# Altium PCB Flight_Controller_PCB.PcbDoc
Units mm, origin at the board's own origin, x right, y up, seen from the top; angles counter-clockwise.
Board outline 56 x 53 mm, 4 copper layers (Top Layer, Layer 1, Layer 2, Bottom Layer), stack 1.587 mm thick; 48 components, 33 nets, 173 pads, 50 vias.
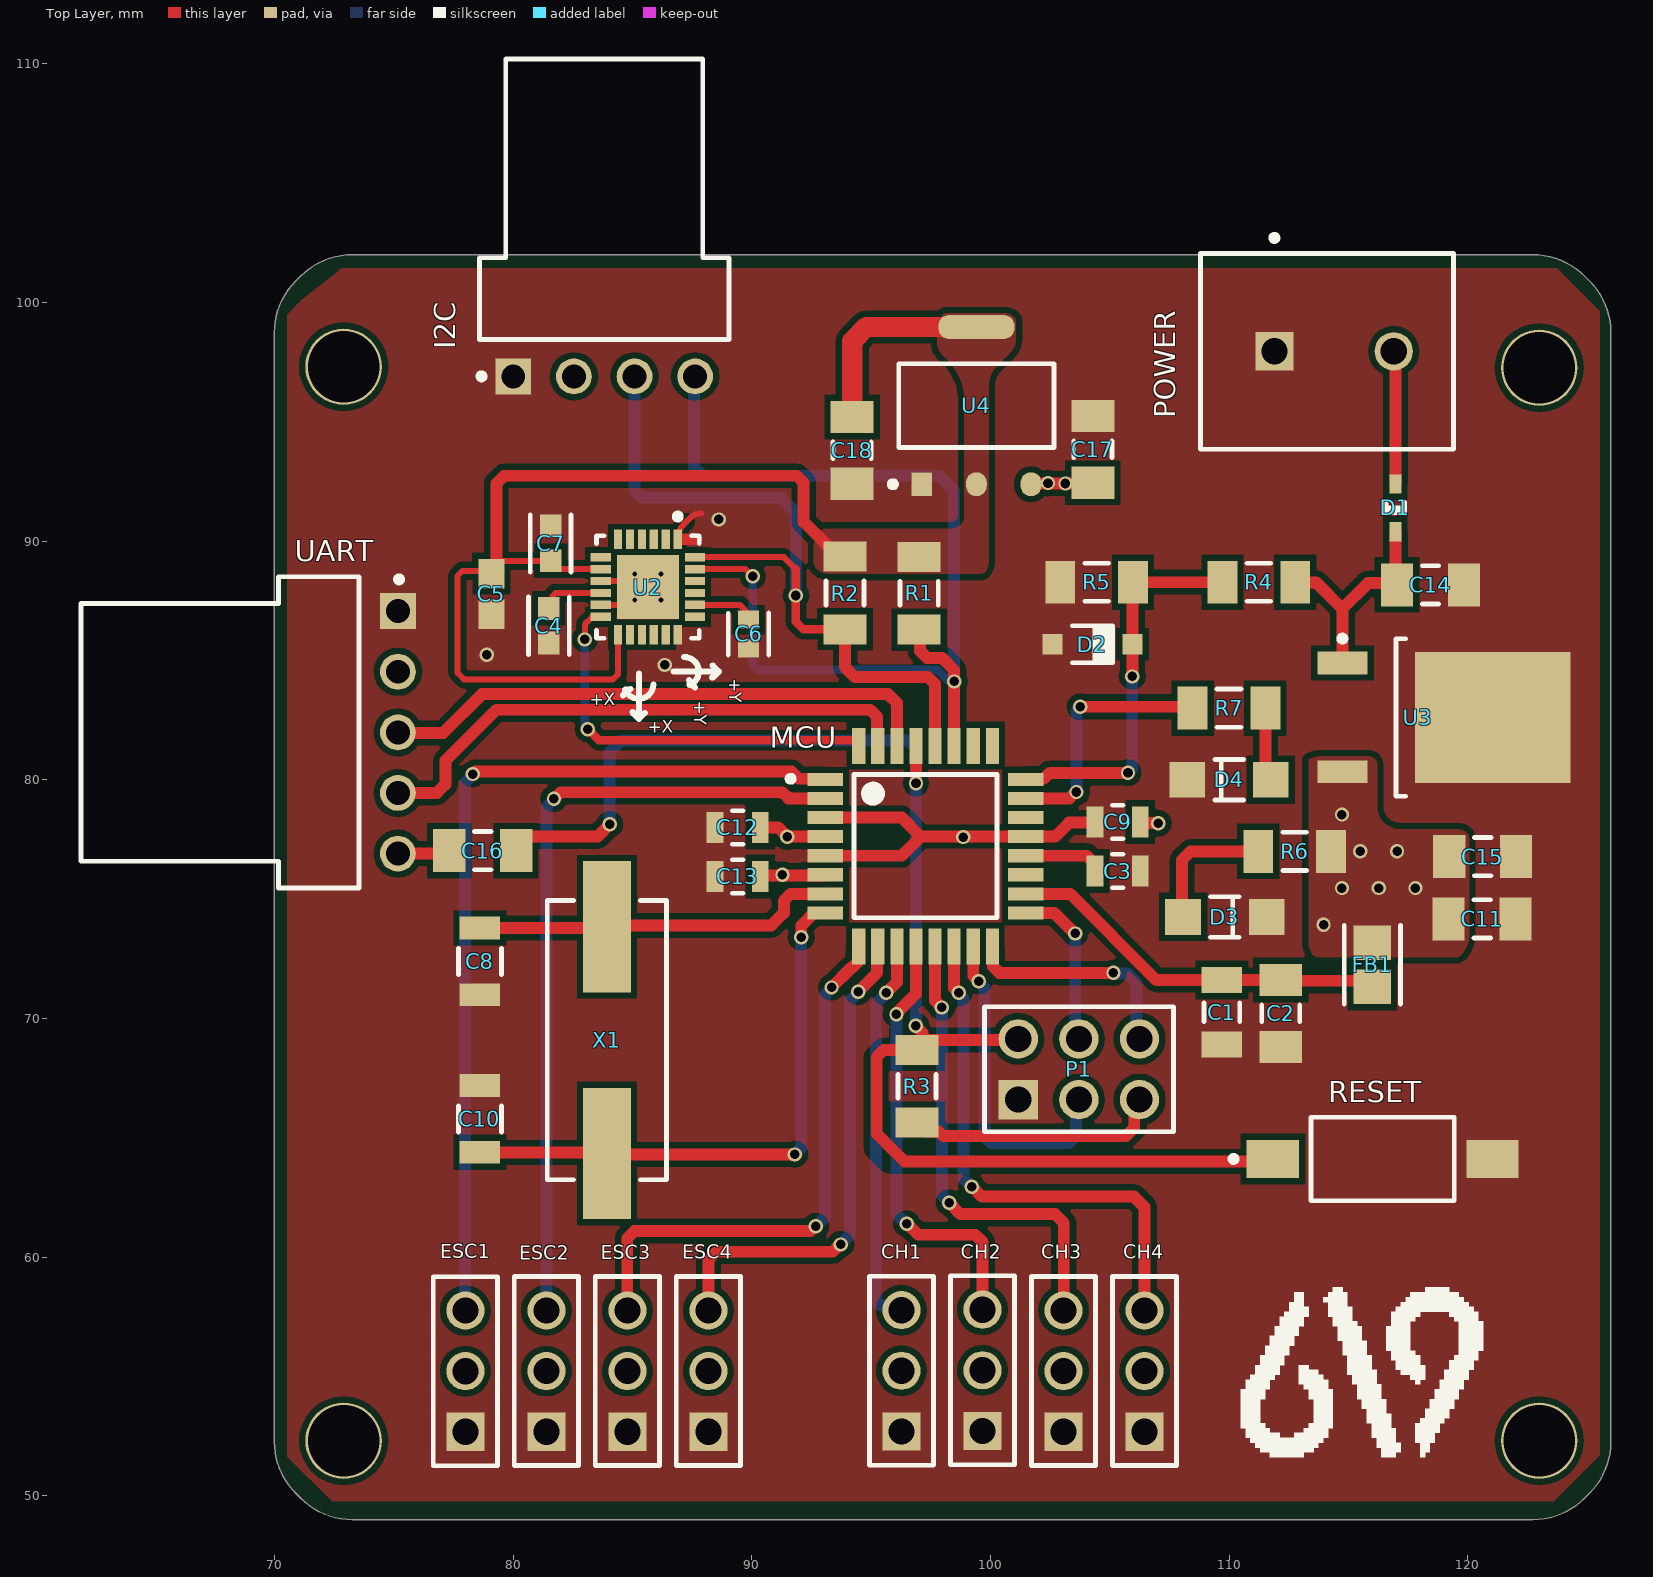
[diagram p0: Top Layer view]
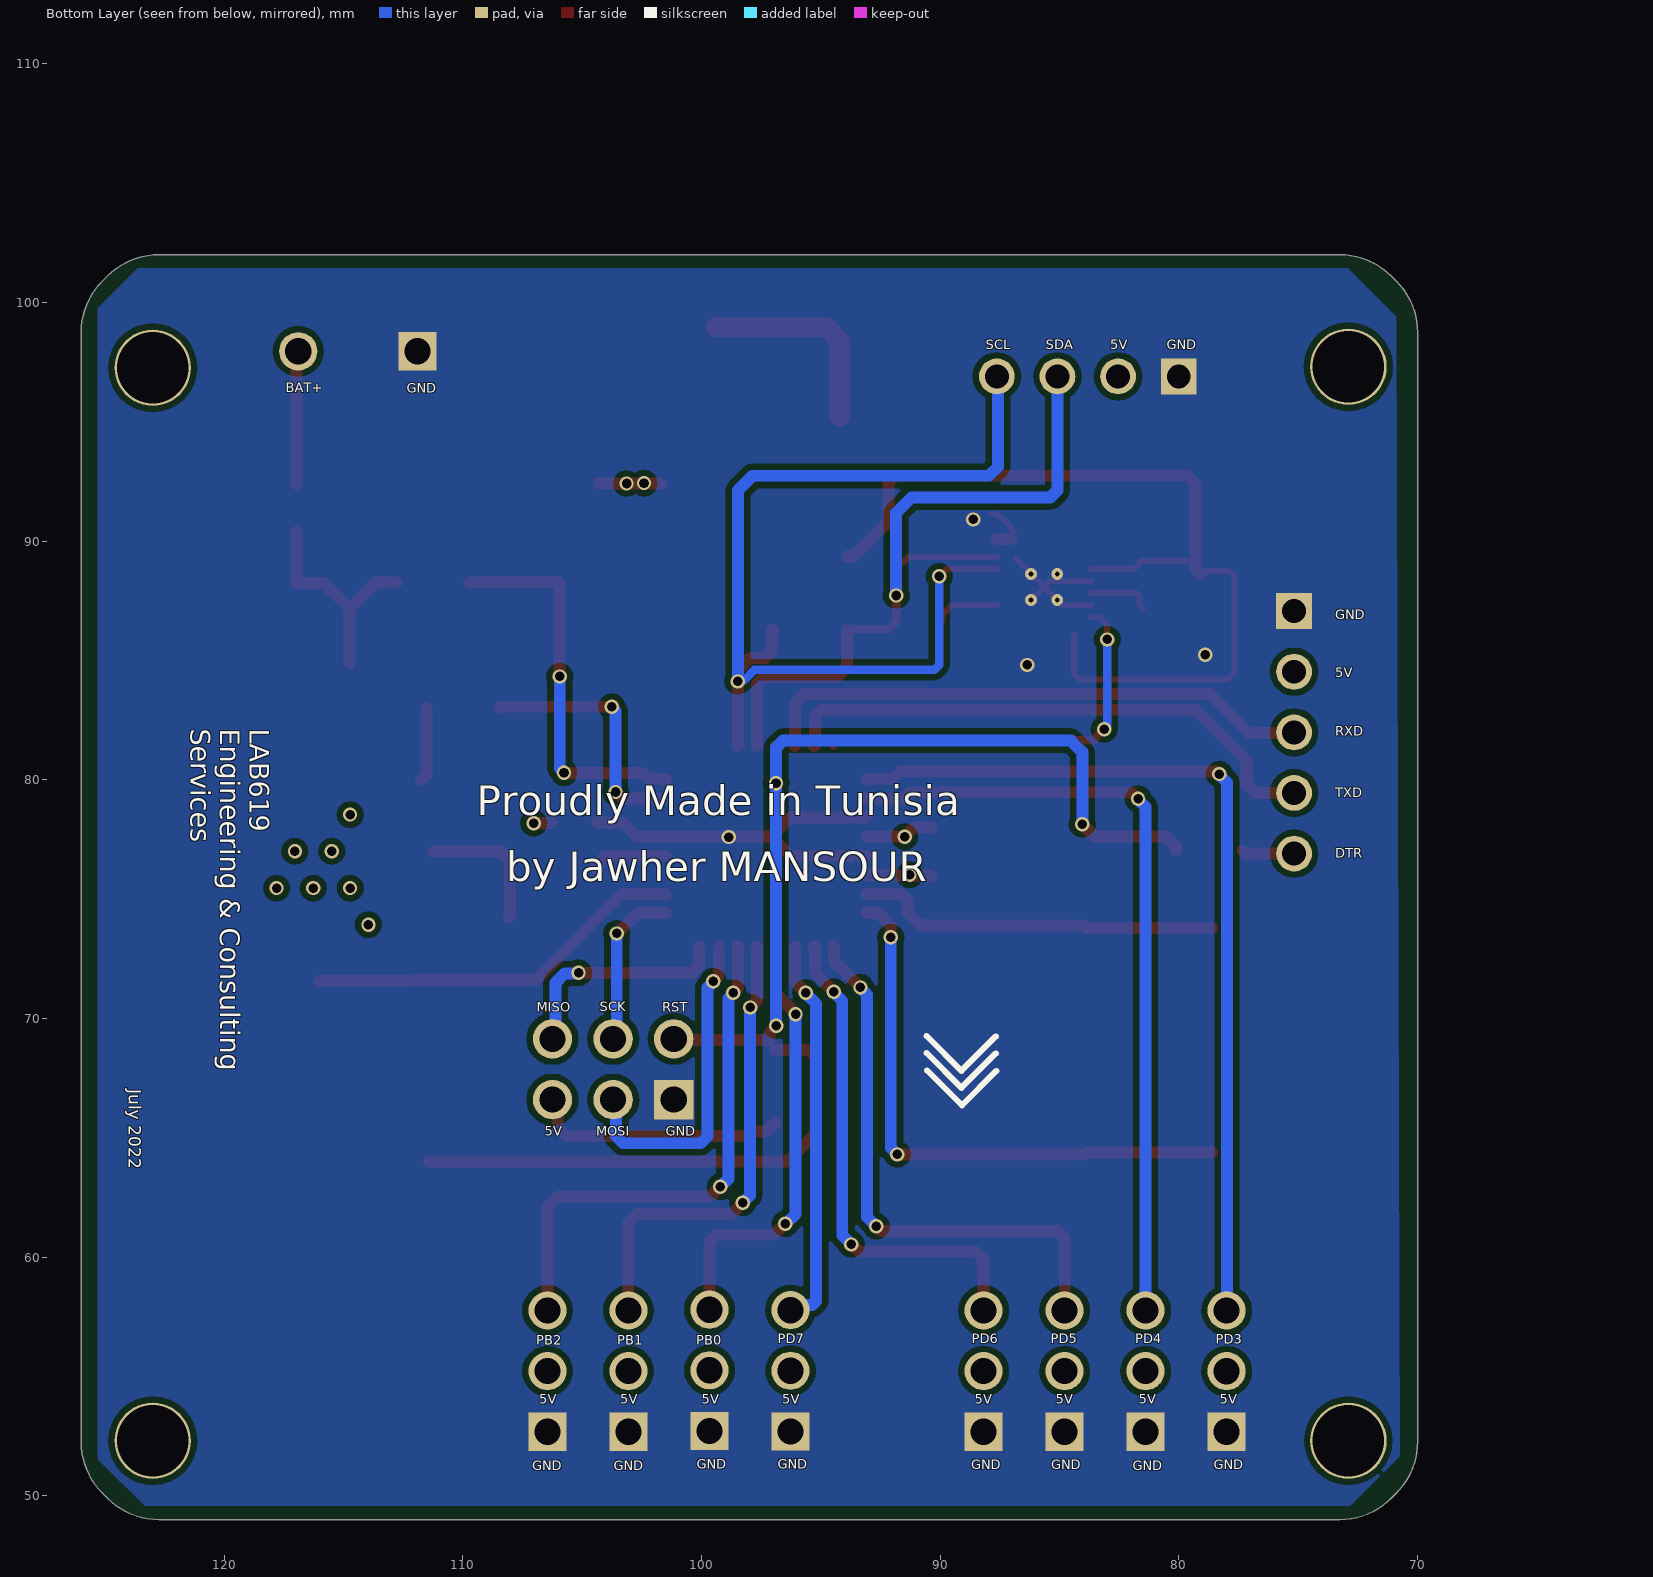
[diagram p1: Bottom Layer view, seen from below]
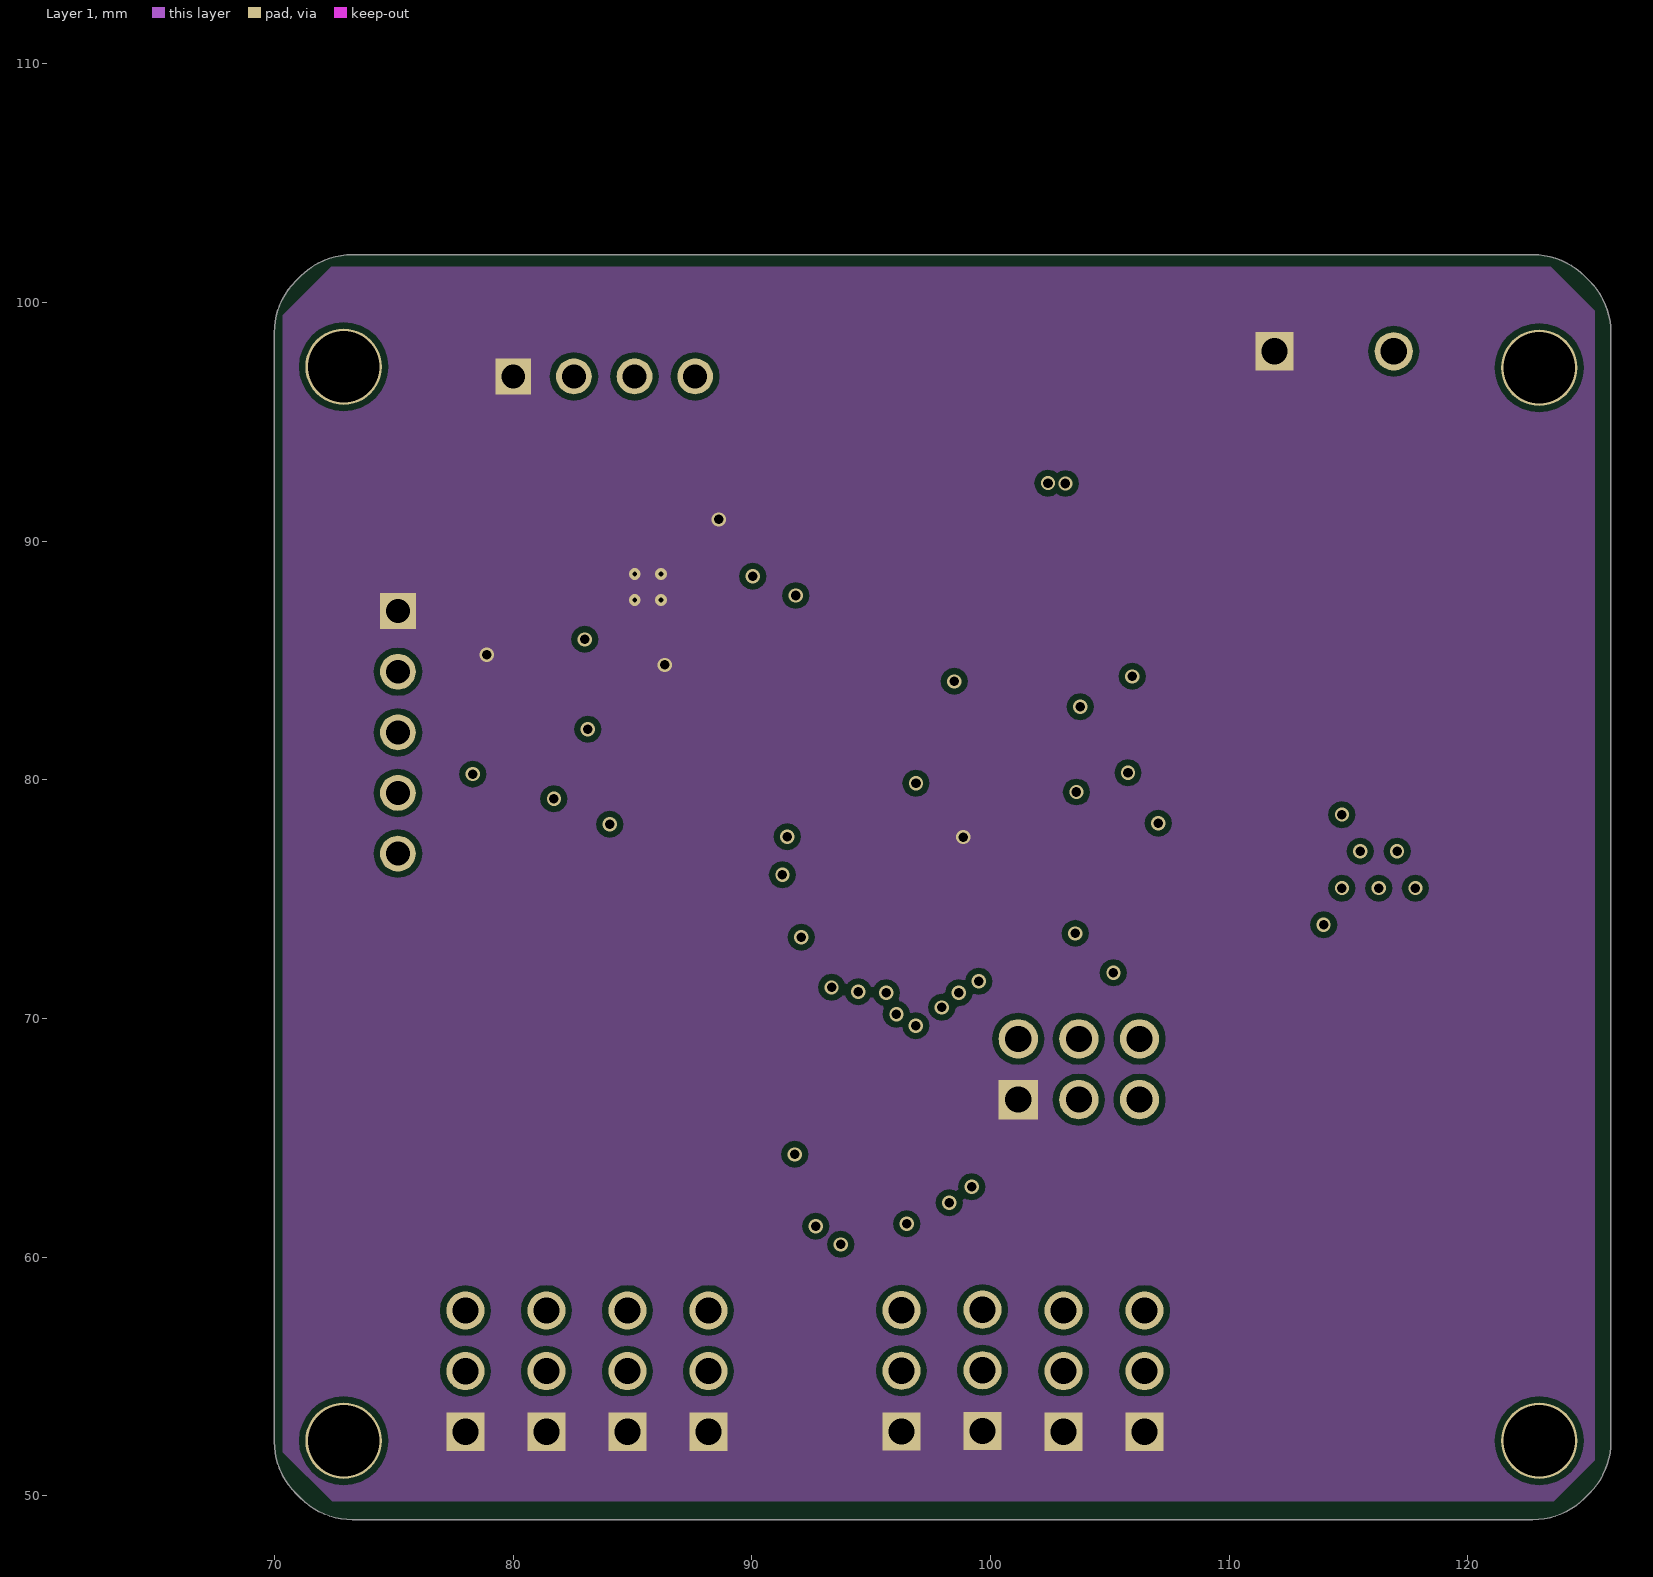
[diagram p2: Layer 1]
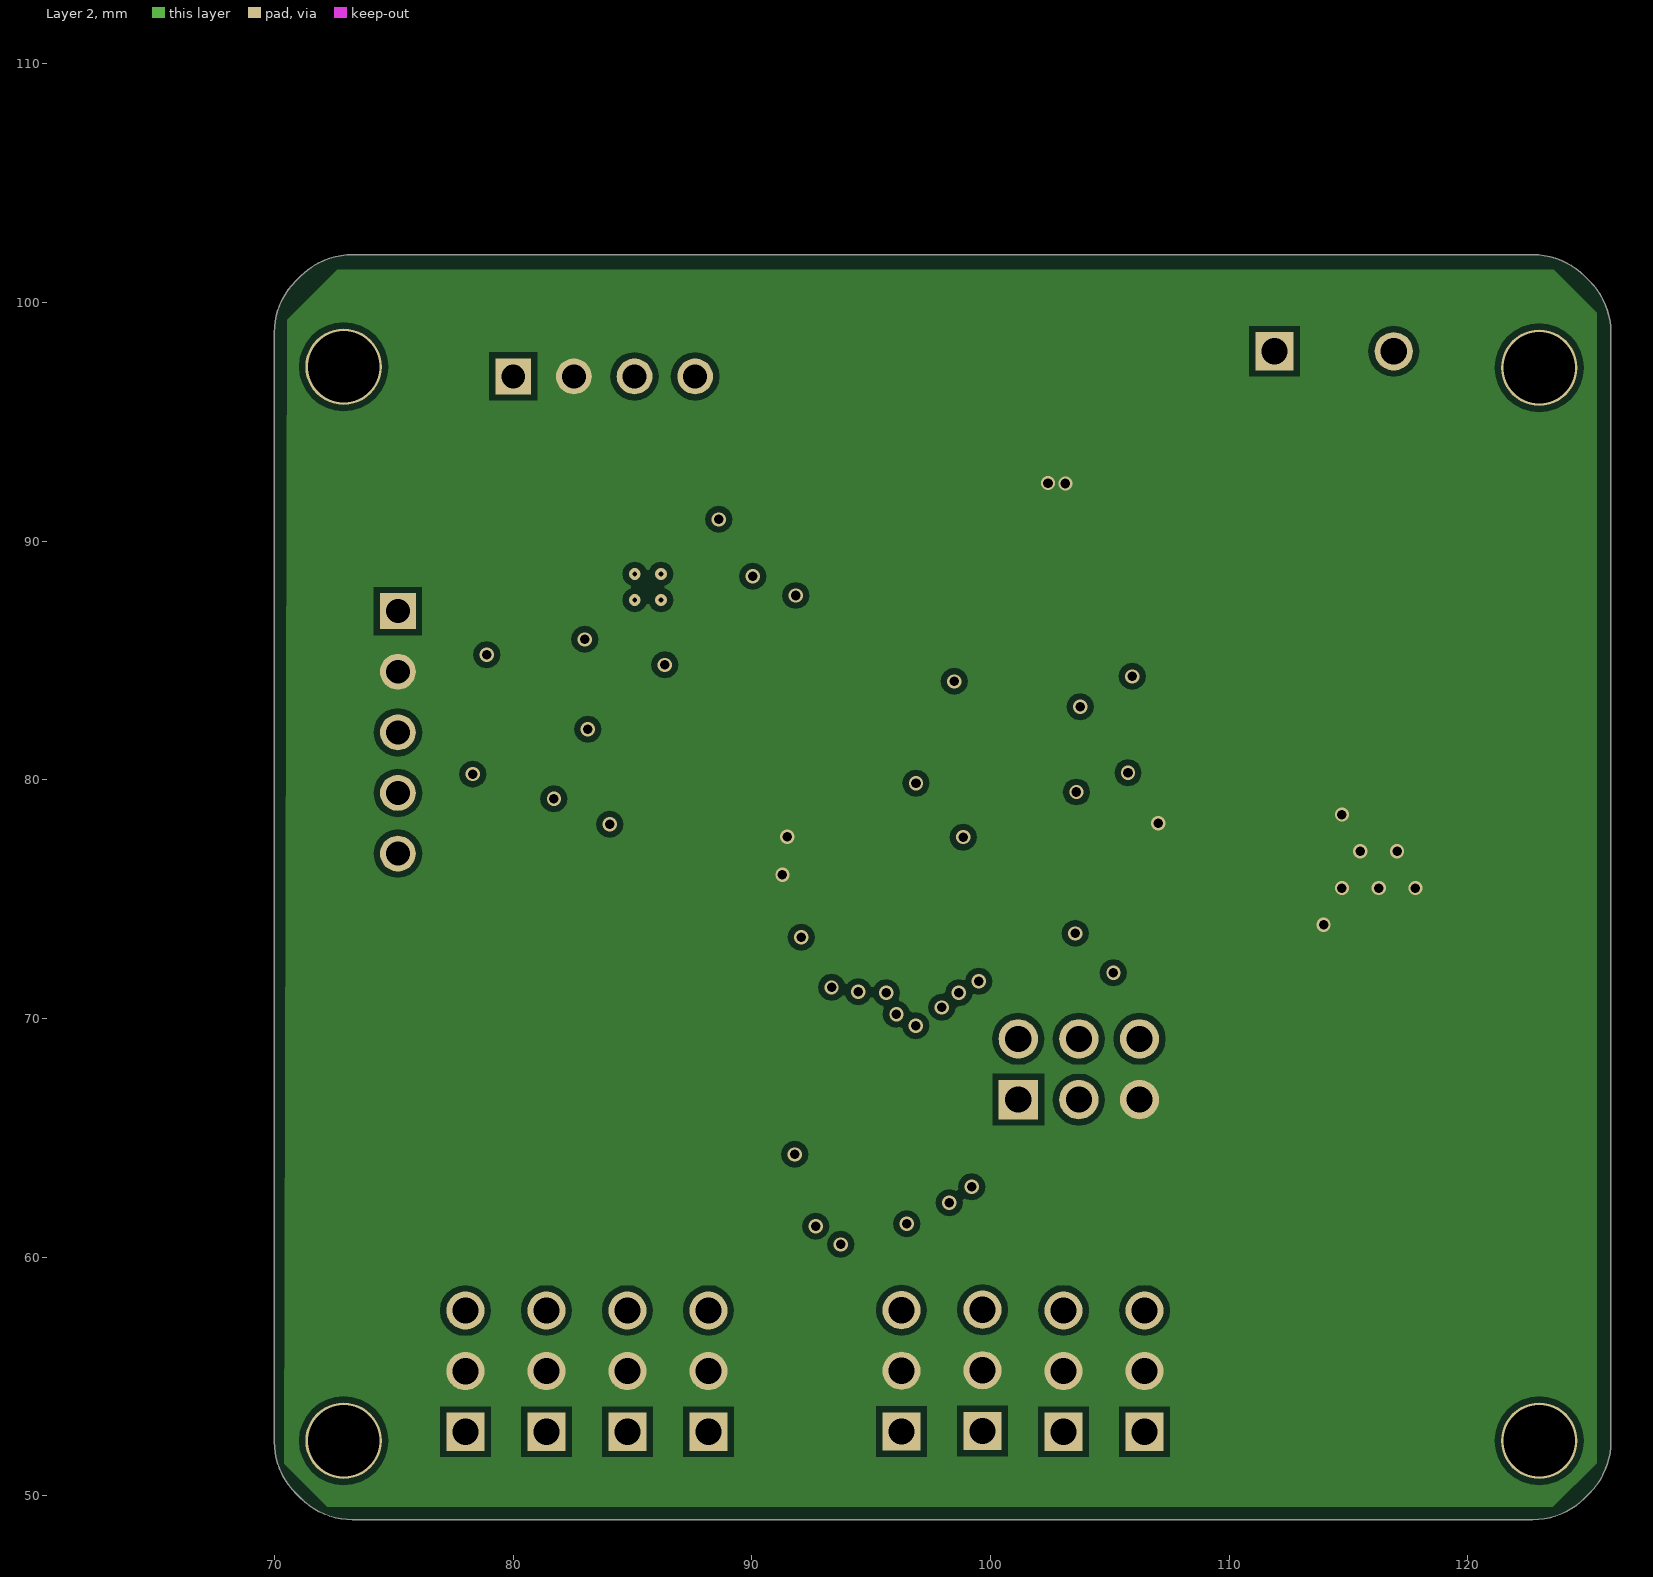
[diagram p3: Layer 2]
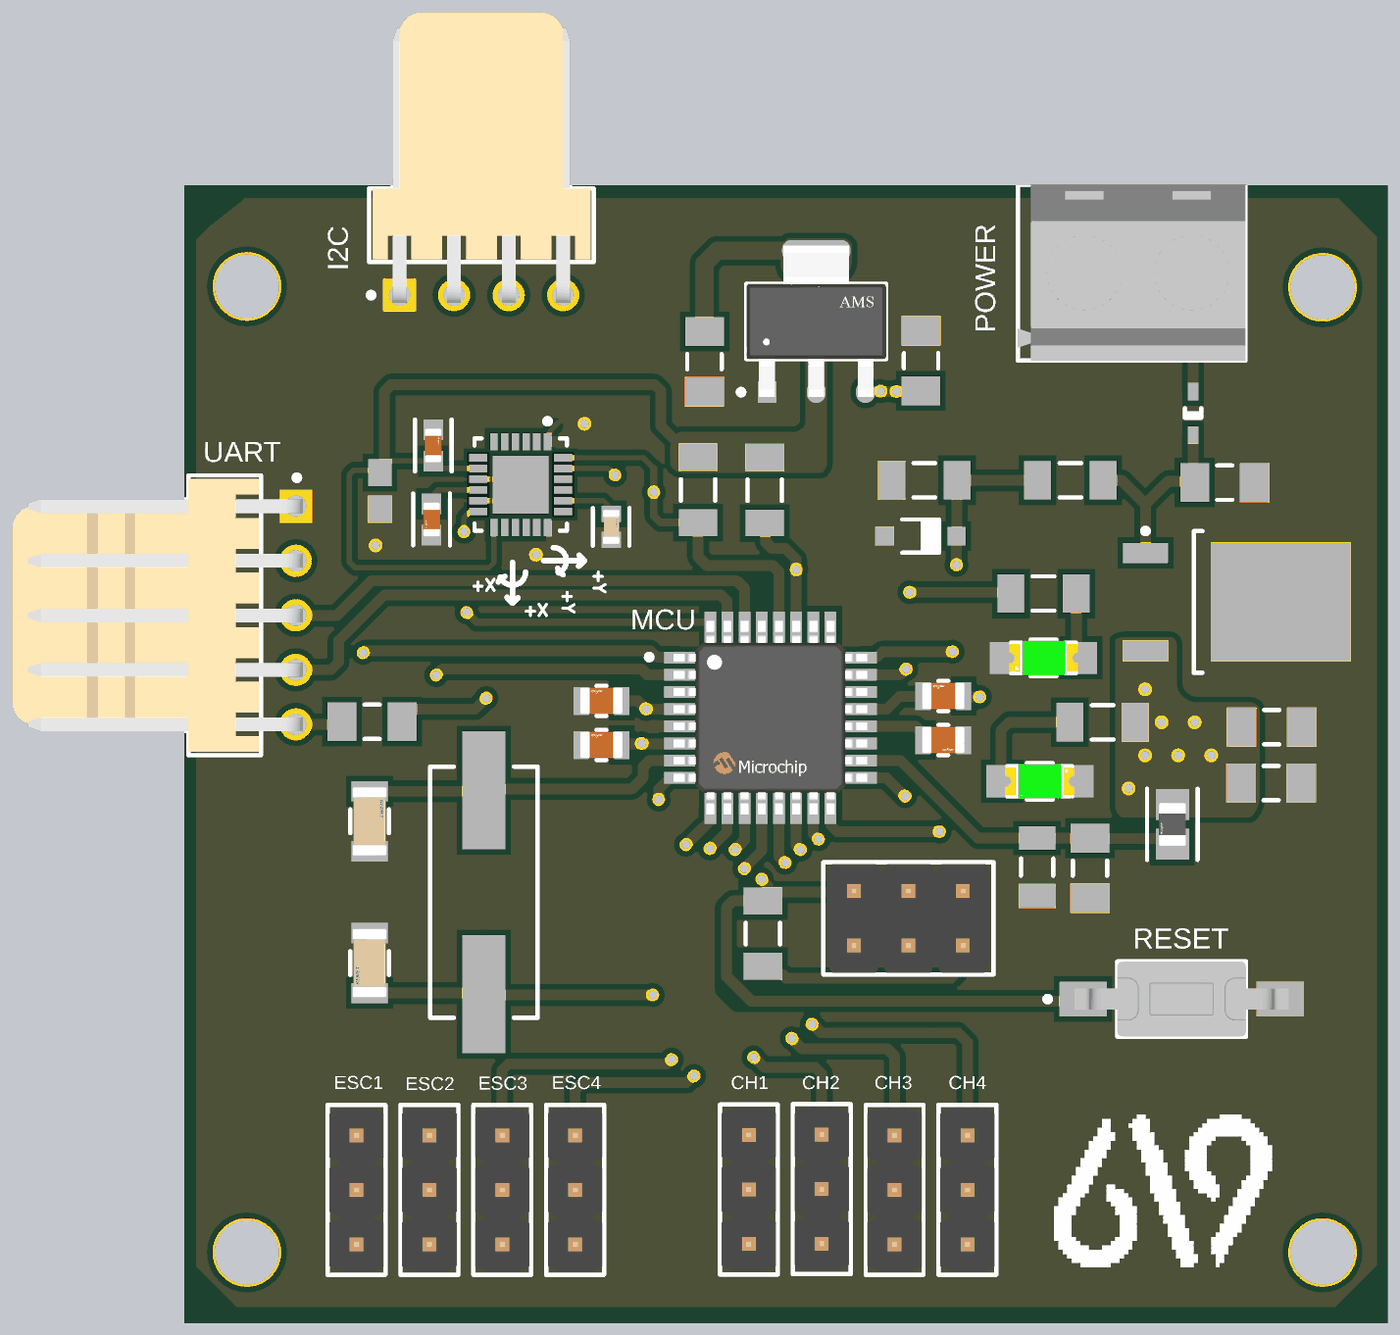
[diagram p4: 3D render of the assembled board from above, using the file's embedded part models]

## Layer stack, top to bottom
Top Solder: solder mask 0.0102, Solder Resist, Dk 3.5
Top Layer: signal copper 0.035
Dielectric 2: prepreg 0.2083, PP-022, Dk 4.5
Layer 1: signal copper 0.018
Dielectric 1: dielectric 1.0643, FR-4, Dk 4.8
Layer 2: signal copper 0.018
Dielectric 3: prepreg 0.2083, PP-022, Dk 4.5
Bottom Layer: signal copper 0.035
Bottom Solder: solder mask 0.0102, Solder Resist, Dk 3.5

## Board outline
70.898,50.102 cw(c73.066,52.27) 70,52.27 70,98.73 cw(c73.066,98.73) 70.898,100.898 71.102,101.102 cw(c73.27,98.934) 73.27,102 122.73,102 cw(c122.73,98.934) 124.898,101.102 125.102,100.898 cw(c122.934,98.73) 126,98.73 126,52.27 cw(c122.934,52.27) 125.102,50.102 124.898,49.898 cw(c122.73,52.066) 122.73,49 73.27,49 cw(c73.27,52.066) 71.102,49.898

## Design rules (kind name [scope] priority, off if disabled: settings)
Clearance [All] p1: gap=0.254 ignorepadtopadclearanceinfootprint=TRUE except(0: Arc-Hole Track-Hole SMDPad-Hole THPad-Hole Via-Hole Fill-Hole Poly-Hole Region-Hole Text-Hole; 0.1: Arc-Arc Arc-Track Track-Track; 0.2: Arc-SMDPad Arc-THPad Track-SMDPad Track-THPad; 0.5: THPad-THPad)
PolygonConnect [All] p1: connectstyle=Direct reliefconductorwidth=0.5 reliefentries=4 polygonreliefangle="90 Angle" airgapwidth=0.5
RoutingVias [All] p1: holewidth=0.4 width=0.6 viastyle="Through Hole" minholewidth=0.2 minwidth=0.4 maxholewidth=0.711 maxwidth=1.27
SolderMaskExpansion [All] p1: expansion=0.02 istentingtop=FALSE
UnRoutedNet [All] p1: checkbadconnections=TRUE
Width [All] p1: maxlimit=2 minlimit=0.1 preferedwidth=0.5 midlayer1_minwidth=0.254 midlayer1_maxwidth=0.254 midlayer1_prefwidth=0.254 midlayer2_minwidth=0.254 midlayer2_maxwidth=0.254 midlayer2_prefwidth=0.254 minimp=50.000000 maximp=50.000000 favimp=50.000000
29 further rules are at their usual default settings.

## Components (designator, comment, footprint, x,y, rotation, side; value= is the part's Value field where it differs from the comment)
C1 "" C1206 109.703,70.256 r270 top value=1uF
C2 "100nF" CAPC3216X95X55NL15T25 112.166,70.206 r90 top
C3 "100nF" FP-GRM21B-0_15-MFG 105.334,76.175 r0 top
C4 "100nF" FP-GRM188-0_1-e0_2_0_5-IPC_B 81.5,86.45 r270 top
C5 "10nF" CAPC1608X90X35ML15T15 79.096,87.782 r90 top
C6 "2nF2" FP-C0603C-CF-MFG 89.865,86.106 r270 top value="2,200 pF"
C7 "100nF" FP-GRM188-0_1-e0_2_0_5-IPC_B 81.575,89.9 r90 top
C8 "22pF" FP-C1206C-EB-MFG 78.613,72.39 r270 top value="22 pF"
C9 "100nF" FP-GRM21B-0_15-MFG 105.334,78.229 r180 top
C10 "22pF" FP-C1206C-EB-MFG 78.613,65.786 r90 top value="22 pF"
C11 "4.7uF" CAPC3216X95X55NL15T25 120.6,74.171 r180 top
C12 "100nF" FP-GRM21B-0_15-MFG 89.408,78 r180 top
C13 "100nF" FP-GRM21B-0_15-MFG 89.408,75.946 r180 top
C14 "330nF" CAPC3216X95X55NL15T25 118.44,88.163 r180 top
C15 "100nF" CAPC3216X95X55NL15T25 120.625,76.775 r180 top
C16 "100nF" CAPC3216X95X55NL15T25 78.729,77.026 r180 top
C17 "10uF" CAPC3216X95X55NL15T25 104.295,93.843 r270 top
C18 "10uF" CAPC3216X95X55NL15T25 94.209,93.802 r90 top
CH1 "61300311121" 61300311121 96.275,55.235 r90 top (schematic designator P5)
CH2 "61300311121" 61300311121 99.669,55.255 r90 top (schematic designator P6)
CH3 "61300311121" 61300311121 103.064,55.222 r90 top (schematic designator P10)
CH4 "61300311121" 61300311121 106.458,55.222 r90 top (schematic designator P11)
D1 "1N4148WT" FAIR-SOD-523F-2_V 116.967,91.389 r90 top
D2 "MMSZ5230B-E3-08" VISH-SOD-123-2_V 104.275,85.675 r0 top
D3 "HSMG-C150" FP-HSMG-C150-MFG 109.825,74.25 r180 top
D4 "HSMG-C150" FP-HSMG-C150-MFG 110,80 r0 top
ESC1 "61300311121" 61300311121 78.003,55.22 r90 top (schematic designator P3)
ESC2 "61300311121" 61300311121 81.398,55.222 r90 top (schematic designator P4)
ESC3 "61300311121" 61300311121 84.792,55.222 r90 top (schematic designator P8)
ESC4 "61300311121" 61300311121 88.186,55.222 r90 top (schematic designator P9)
FB1 "100MHz" FP-BLM21-0_2-t0_85-e0_5-IPC_A 116.002,72.249 r270 top
I2C "61900419521" 61900419521 83.82,104.32 r180 top (schematic designator P2)
MCU "ATmega328P-AU" FP-32A-MFG 97.282,77.216 r0 top (schematic designator U1)
P1 "ICSP" 61300621121 103.708,67.869 r0 top
POWER "282836-2" TECO-282836-2_V 114.4,97.95 r0 top (schematic designator J1)
R1 "2K2" RESC3116X65X40ML10T20 97.013,87.813 r270 top
R2 "2K2" RESC3116X65X40ML10T20 93.909,87.822 r270 top
R3 "10K" RESC3116X65X40ML10T20 96.926,67.158 r90 top
R4 "10K" RESC3116X65X40ML10T20 111.25,88.275 r0 top
R5 "1K" RESC3116X65X40ML10T20 104.45,88.275 r0 top
R6 "330" RESC3116X65X40ML10T20 112.75,77 r0 top
R7 "330" RESC3116X65X40ML10T20 110,83 r0 top
RESET "FSMSM" TECO-FSMSM-2_V 116.434,64.11 r0 top (schematic designator SW1)
U2 "MPU-6050" IS-QFN-24_V 85.65,88.075 r270 top
U3 "L7805CDT-TR" TO-252_N 119,82.609 r0 top
U4 "AMS1117-3.3" FP-AMS1117-IPC_C 99.413,95.675 r90 top
UART "61900511021" 61900511021 67.725,81.985 r270 top (schematic designator P7)
X1 "16MHz" FOX-FOXSDLF160-20_V 83.934,69.088 r270 top

## Footprints (in the part's own frame and the unit in brackets; to place one, negate y for a bottom-side part, rotate by r counter-clockwise, add the part's x,y. Pads: shape width x height; smd on the part's side, far side on the other; paste and mask are expansions set on the pad)
61300311121 [mm] "Pin Header, pitch 2.54 mm, THT, Vertical, single row, 3p"
  rect 1.6x1.6 hole 1.1: 1(-2.54,0)
  round 1.6 hole 1.1: 2(0,0) 3(2.54,0)
  silkscreen extent -3.96,-1.35 3.96,1.35, body extent -3.81,-1.27 3.81,1.27, height 8.57
61300621121 [mm] "Pin Header, pitch 2.54 mm, THT, Vertical, dual row, 6p"
  rect 1.65x1.65 hole 1.1: 1(-2.54,-1.27)
  round 1.65 hole 1.1: 2(-2.54,1.27) 3(0,-1.27) 4(0,1.27) 5(2.54,-1.27) 6(2.54,1.27)
  silkscreen extent -3.96,-2.62 3.96,2.62, body extent -3.81,-2.54 3.81,2.54, height 8.59
61900419521 [mm] "2.54mm Male Right Angled Locking Header Top Locking, 4p"
  rect 1.5x1.5 hole 1: 1(3.81,7.42)
  round 1.5 hole 1: 2(1.27,7.42) 3(-1.27,7.42) 4(-3.81,7.42)
  silkscreen extent -5.23,-5.87 5.26,7.54, body extent -5.08,-5.75 5.08,7.77, height 5.83
61900511021 [mm] "2.54mm Male Left Angled Header Bottom Locking, 5p"
  rect 1.5x1.5 hole 1: 1(-5.08,7.45)
  round 1.5 hole 1: 2(-2.54,7.45) 3(0,7.45) 4(2.54,7.45) 5(5.08,7.45)
  silkscreen extent -6.53,-5.82 6.52,7.63, body extent -6.35,-5.75 6.35,7.77, height 5.83
C1206 [mm] "Chip Capacitor, Body 3.2x1.6mm, IPC High Density"
  rect 1.1x1.7 smd: 1(-1.35,0) 2(1.35,0)
  silkscreen extent -0.4,-0.75 0.4,0.75, body extent -1.7,-0.9 1.7,0.9, height 1.3
CAPC1608X90X35ML15T15 [mm] "Chip Capacitor, 2-Leads, Body 1.60x0.81mm, IPC Low Density"
  rect 1.25x1.1 smd: 1(-0.85,0) 2(0.85,0)
  body extent -0.88,-0.48 0.87,0.48, height 0.9
CAPC3216X95X55NL15T25 [mm] "Chip Capacitor, 2-Leads, Body 3.35x1.75mm, IPC Medium Density"
  rect 1.35x1.8 smd: 1(-1.4,0) 2(1.4,0)
  silkscreen extent -0.35,-0.8 0.35,0.8, body extent -1.68,-0.87 1.68,0.87, height 0.95
FAIR-SOD-523F-2_V [mm] "SMD, 2-Leads, Body 1.2x0.8mm, Height 0.7mm"
  rect 0.8x0.5 smd: 1(-1,0) 2(1,0)
  silkscreen extent -0.2,-0.38 0.24,0.38, body extent -0.6,-0.4 0.6,0.4, height 0.71
FOX-FOXSDLF160-20_V [mm] "SMD, 2-Leads, Body 5x11.7mm, Height 4.5mm"
  rect 5.5x2 smd: 1(-4.75,0) 2(4.75,0)
  silkscreen extent -5.85,-2.5 5.85,2.5, body extent -5.85,-2.5 5.85,2.5, height 4.5
FP-32A-MFG [mm]
  rect 1.5x0.55 smd paste+0 mask+0: 1(-4.2,2.8) 2(-4.2,2) 3(-4.2,1.2) 4(-4.2,0.4) 5(-4.2,-0.4) 6(-4.2,-1.2) 7(-4.2,-2) 8(-4.2,-2.8) 17(4.2,-2.8) 18(4.2,-2) 19(4.2,-1.2) 20(4.2,-0.4) 21(4.2,0.4) 22(4.2,1.2) 23(4.2,2) 24(4.2,2.8)
  rect 0.55x1.5 smd paste+0 mask+0: 9(-2.8,-4.2) 10(-2,-4.2) 11(-1.2,-4.2) 12(-0.4,-4.2) 13(0.4,-4.2) 14(1.2,-4.2) 15(2,-4.2) 16(2.8,-4.2) 25(2.8,4.2) 26(2,4.2) 27(1.2,4.2) 28(0.4,4.2) 29(-0.4,4.2) 30(-1.2,4.2) 31(-2,4.2) 32(-2.8,4.2)
  silkscreen extent -5.77,-3 3,3, body extent -5.05,-5.05 5.05,5.05, height 0.25
FP-AMS1117-IPC_C [mm]
  rect 1.004x0.872 smd paste+0 mask+0: 1(-3.295,2.29)
  rrect100% 1.004x0.872 smd paste+0 mask+0: 2(-3.295,0) 3(-3.295,-2.29)
  rrect87% 1.004x3.182 smd paste+0 mask+0: 4(3.295,0)
  silkscreen extent -3.42,-3.25 1.75,3.62, body extent -3.9,-3.35 3.9,3.35, height 0.25
FP-BLM21-0_2-t0_85-e0_5-IPC_A [mm]
  rect 1.455x1.556 smd paste+0 mask+0: 1(-0.926,0) 2(0.926,0)
  silkscreen extent -1.65,-1.18 1.65,1.18, body extent -2.15,-1.28 2.15,1.28, height 0.25
FP-C0603C-CF-MFG [mm]
  rect 0.75x0.9 smd paste+0 mask+0: 1(-0.6,0) 2(0.6,0)
  silkscreen extent -0.87,-0.85 0.88,0.85, body extent -1.2,-0.6 1.2,0.6, height 0.25
FP-C1206C-EB-MFG [mm]
  rect 0.95x1.7 smd paste+0 mask+0: 1(-1.4,0) 2(1.4,0)
  silkscreen extent -0.55,-0.9 0.55,0.9, body extent -2,-1 2,1, height 0.25
FP-GRM21B-0_15-MFG [mm]
  rect 0.7x1.3 smd paste+0 mask+0: 1(-0.95,0) 2(0.95,0)
  silkscreen extent -0.23,-0.7 0.23,0.7, body extent -1.4,-0.8 1.4,0.8, height 0.25
FP-GRM188-0_1-e0_2_0_5-IPC_B [mm]
  rect 0.959x0.912 smd paste+0 mask+0: 1(-0.727,0) 2(0.727,0)
  silkscreen extent -1.21,-0.86 1.21,0.86, body extent -1.46,-0.71 1.46,0.71, height 0.25
FP-HSMG-C150-MFG [mm]
  rect 1.5x1.5 smd paste+0 mask+0: 1(-1.75,0) 2(1.75,0)
  silkscreen extent -0.6,-0.85 0.6,0.85, body extent -2.6,-0.95 2.6,0.95, height 0.25
IS-QFN-24_V [mm] "QFN, 24-Leads, Body 4x4mm, Pitch 0.5mm, Thermal Pad 2.7x2.6mm"
  rect 0.8x0.35 smd: 1(-2,1.25) 2(-2,0.75) 3(-2,0.25) 4(-2,-0.25) 5(-2,-0.75) 6(-2,-1.25) 13(2,-1.25) 14(2,-0.75) 15(2,-0.25) 16(2,0.25) 17(2,0.75) 18(2,1.25)
  rect 0.35x0.85 smd mask+0.102: 7(-1.25,-1.975) 8(-0.75,-1.975) 9(-0.25,-1.975) 10(0.25,-1.975) 11(0.75,-1.975) 12(1.25,-1.975) 19(1.25,1.975) 20(0.75,1.975) 21(0.25,1.975) 22(-0.25,1.975) 23(-0.75,1.975) 24(-1.25,1.975)
  rect 2.7x2.6 smd: 25(0,0)
  silkscreen extent -3.07,-2.15 2.15,2.15, body extent -2,-2 2,2, height 0.95
RESC3116X65X40ML10T20 [mm] "Chip Resistor, 2-Leads, Body 3.10x1.60mm, IPC Low Density"
  rect 1.25x1.8 smd: 1(-1.525,0) 2(1.525,0)
  silkscreen extent -0.5,-0.8 0.5,0.8, body extent -1.6,-0.85 1.6,0.85, height 0.65
TECO-282836-2_V [mm] "Female Header, Pitch 5mm, 1 x 2 Position, Height 10mm"
  rect 1.6x1.6 hole 1.1: 1(-2.5,0)
  round 1.6 hole 1.1: 2(2.5,0)
  silkscreen extent -5.6,-4.1 5,4.87, body extent -5.6,-4.1 5,4.1, height 10
TECO-FSMSM-2_V [mm] "SMD, 2-Leads, Body 6x3.5mm, Pitch 9.19mm"
  rect 2.2x1.6 smd: 1(-4.595,0)
  rect 2.18x1.6 smd: 2(4.595,0)
  silkscreen extent -6.37,-1.75 3,1.75, body extent -4.98,-1.75 4.98,1.75, height 4.4
TO-252_N [mm] "D-PAK, 4-Leads, Body 6.1x6.5mm, Pitch 2.28mm, Lead Span 9.7mm, IPC Medium Density"
  rect 2.1x0.95 smd: 1(-4.25,2.28) 3(-4.25,-2.28)
  rect 6.5x5.5 smd: 4(2.05,0)
  silkscreen extent -4.37,-3.3 -1.6,3.43, body extent -2,-3.3 4.2,3.3, height 2.4
VISH-SOD-123-2_V [mm] "SMD, 2-Leads, Body 2.7x1.55mm, Height 1.35mm"
  rect 0.85x0.85 smd: 1(-1.675,0) 2(1.675,0)
  silkscreen extent -0.85,-0.77 0.85,0.78, body extent -1.35,-0.77 1.35,0.77, height 1.35

## Part data
C1: library part "Cap Pol2", "Polarized Capacitor (Axial)", LatestRevisionDate=17-Jul-2002, LatestRevisionNote="Re-released for DXP Platform.", PackageDescription="Polarized Capacitor; 2 Leads", PackageReference=POLAR0.8, Published=8-Jun-2000, Publisher="Altium Limited"
C2 C11 C14 C15 C16 C17 C18: library part CMP-1662-00007-4, "Chip Capacitor, 0.1 uF, +/- 10%, 50 V, -55 to 125 degC, 1206 (3216 Metric), RoHS, Tape and Reel", Manufacturer=Murata, Max Operating Temperature="125 degC", Min Operating Temperature="-55 degC", Package Quantity=4000, Voltage Rating="50 V", ComponentLink1Description="Manufacturer URL", ComponentLink1URL=http://www.murata.com/, ComponentLink2Description=Datasheet, ComponentLink2URL=http://search.murata.co.jp/Ceramy/image/img/A01X/G101/ENG/GRM319R71H104KA01-01.pdf, DatasheetVersion=03/2016, Height="0.85 mm", Lead Pitch="4 mm", Length="3.2 mm", Mount="Surface Mount", Mounting Technology="Surface Mount", PackageDescription="2-Pin Surface Mount Device, Body 3.2 x 1.6 mm", PackageReference="1206 (3216 Metric)", Packaging="Tape and Reel", Pins=2, REACH SVHC="No SVHC", RoHSCompliant=true
C3 C9 C12 C13: library part CMP-2007-03385-2, "Chip Multilayer Ceramic Capacitors for General Purpose, 0805, 22uF, X5R, 15%, 20%, 6.3V", Capacitance=22uF, Case Code (Imperial)=0805, Case Code (Metric)=2012, Dielectric=X5R, Max Operating Temperature=85°C, Min Operating Temperature=-55°C, Package Quantity=1, Tolerance=20%, Voltage=6.3V, Case/Package=0805, Depth=1.25mm, Height=1.25mm, Lead Free="Lead Free", Length=2mm, Material=Ceramic, Mount="Surface Mount", Packaging="Tape and Reel", Radiation Hardening=No, REACH SVHC="No SVHC", Termination=SMD/SMT, Thickness=0.053inch, Voltage Rating=6.3V, Voltage Rating (DC)=6.3V, Width=0.049inch
C4 C7: library part CMP-1035-02595-8, "Chip Multilayer Ceramic Capacitors for General Purpose, 0603, 0.10uF, X7R, 15%, 10%, 100V", Case Code (Imperial)=0603, Case Code (Metric)=1608, Dielectric=X7R, Max Operating Temperature=125°C, Min Operating Temperature=-55°C, Package Quantity=1, Tolerance=10%, Voltage=100V, Capacitance=100nF, Case/Package=0603, Depth=0.8mm, Height=0.8mm, Lead Free="Lead Free", Length=1.6mm, Material=Ceramic, Mount="Surface Mount", Packaging="Tape and Reel", Radiation Hardening=No, REACH SVHC="No SVHC", Termination=SMD/SMT, Thickness=0.035inch, Voltage Rating=100V, Voltage Rating (DC)=100V, Weight=0.000222oz, Width=0.8mm
C5: library part CMP-2006-04548-1, Manufacturer="AVX Interconnect / Elco", Part Number=0603ZC103MAT2A
C6: library part CMP-1035-02041-2, "CAP CER 2200PF 100V NP0 0603", Capacitance="2,200 pF", Manufacturer=KEMET, Manufacturer Part Number=C0603C222F1GACTU, Package=C0603C-CF, Temperature="-55°C to +125°C", Temperature Characteristic=C0G, Temperature Coefficient=30ppm/°C, Temperature Range High=+125°C, Temperature Range Low=-55°C, Tolerance=0.01, Voltage Rating="100 V", Automotive=Yes, Automotive Grade="Grade 1", Category=Cap, ComponentLink2Description=Datasheet, ComponentLink2URL=https://api.kemet.com/component-edge/download/datasheet/C0603C100J5GACAUTO.pdf, Device Class L1="Passive Components", Device Class L2=Capacitors, Device Class L3="Ceramic Capacitors", Digikey Description="CAP CER 2200PF 100V NP0 0603", Height=0.87mm, Lead Free=Yes, Material=Ceramic, Mouser Description="Cap Ceramic 0.0022uF 100V C0G 1% SMD 0603 Paper T/R", Octopart=https://octopart.com/c0603c222f1gactu-kemet-16902737, RoHS=TRUE
C8 C10: library part CMP-1037-00989-2, "CAP CER 22PF 100V 5% NP0 1206", Capacitance="22 pF", Manufacturer=KEMET, Manufacturer Part Number=C1206C220J1GACTU, Package=C1206C-EB, Temperature="-55°C to +150°C", Temperature Characteristic=C0G, Temperature Coefficient=15%, Temperature Range High=+150°C, Temperature Range Low=-55°C, Tolerance=0.05, Voltage Rating="100 V", Automotive=Yes, Automotive Grade="Grade 0", Category=Cap, ComponentLink2Description=Datasheet, ComponentLink2URL=https://content.kemet.com/datasheets/KEM_C1007_X8R_ULTRA_150C_SMD.pdf, Device Class L1="Passive Components", Device Class L2=Capacitors, Device Class L3="Ceramic Capacitors", Digikey Description="CAP CER 22PF 100V 5% NP0 1206", Height=0.88mm, Ipc Land Pattern Name=CAPC320160X78, Lead Free=Yes, Material=Ceramic, Mouser Description="1206 22pF Ceramic Multilayer Capacitor; 100VDC; 125degC; C0G Dielec; +/-5% SMD", Octopart=https://octopart.com/c1206c220j1gactu-kemet-9145181, RoHS=TRUE
CH1 CH2 CH3 CH4 ESC1 ESC2 ESC3 ESC4: library part CMP-1502-01062-1, "THT Vertical Pin Header WR-PHD, Pitch 2.54 mm, Single Row, 3 pins", Contact Resistance=20mOhm, Manufacturer="Wurth Elektronik", Operating Temperature=-40to105degC, Rated Current=3A, Withstanding Voltage=500VAC, Working Voltage=250VAC, Datasheet URL=https://katalog.we-online.de/em/datasheet/6130xx11121.pdf, Gender=Male, Manufacturer URL=http://www.we-online.de, Mounting Technology=THT, Orientation=Vertical, Package Reference=61300311121, Packaging=Bag, Part Number=61300311121, Pin Number=3, Pitch=2.54mm, Publisher=WurthElektronik, Row Number=Single
D1: library part CMP-0881-00001-1, "High Conductance Fast Switching Diode, 75 V, -55 to 150 degC, 2-Pin SOD523F, RoHS", Manufacturer="Fairchild Semiconductor", Temperature Range="-55 to 150 degC", BVR (IR="5 uA)=75 V Min.", CO="4 pF Max.", ComponentLink1Description="Manufacturer URL", ComponentLink1URL=http://www.fairchildsemi.com/, ComponentLink2Description=Datasheet, ComponentLink2URL=http://www.fairchildsemi.com/ds/1N/1N4148WT.pdf, DatasheetVersion="Rev. A2", IR (VR="75 V)=5 uA Max.", Mounting Technology="Surface Mount", PackageDescription="2-Pin Surface Mount Device, Body 1.2 x 0.8 mm, Height 0.7 mm", PackageReference=SOD-523F-2, PartNumber=1N4148WT, RoHS=TRUE, VF="1 V Max."
D2: library part CMP-0931-00028-1, "Small Signal Zener Diode, 4.7 V +/- 5%, -55 to 155 degC, 2-Pin SOD-123, RoHS, Tape and Reel", Manufacturer="Vishay Semiconductor", Operating Temperature="-55 to 150 degC", Power Dissipation (mW)=500, Test Current (IZT1) (mA)=20, Tolerance="+/- 5%", Zener Voltage (NOM.) (V)=4.7, ComponentLink1Description="Manufacturer URL", ComponentLink1URL=http://www.vishay.com/, ComponentLink2Description=Datasheet, ComponentLink2URL=http://www.vishay.com/docs/85774/mmsz5225.pdf, ComponentLink3Description="Package Specification", ComponentLink3URL=http://www.vishay.com/docs/85774/mmsz5225.pdf, DatasheetVersion="Rev. 1.9", Int. Construction=Single, Mounting Technology="Surface Mount", PackageDescription="2-Pin SMD, Body 2.7 x 1.55 mm, Height 1.35 mm", PackageReference=SOD-123-2, PackageVersion="Rev. 1.9", Packing="Tape and Reel", PartNumber=MMSZ5230B-E3-08, RoHS=TRUE, Zener Impedance (IZT1) (Max.) (Ohm)=19
D3 D4: library part CMP-2000-05061-2, "LED GREEN DIFFUSED 1206 SMD", Colour=Green, Forward Current=20mA, Forward Voltage=2.2V, Manufacturer=Broadcom, Max Junction Temp=+95°C, Power Dissipation=65mW, Reverse Voltage=5V, Temperature="-40°C to +85°C", Temperature Range High=+85°C, Temperature Range Low=-40°C, Automotive=No, Category=Diode, ComponentLink2Description=Datasheet, ComponentLink2URL=https://docs.broadcom.com/docs/AV02-0551EN, Device Class L1=Optoelectronics, Device Class L2=LEDs, Device Class L3=unset, Digikey Description="LED GREEN DIFFUSED 1206 SMD", Height=1.2mm, Ipc Land Pattern Name=DIOCP320160X55, Lead Free=Yes, Led Orientation="Top View", Luminous Intensity=15mcd, Manufacturer Part Number=HSMG-C150, Mouser Description="LED Uni-Color Green 570nm 2-Pin Chip LED T/R", Octopart=https://octopart.com/hsmg-c150-broadcom-71131304, Package=HSMG-C150, Peak Emmision Wavelength=570nm, RoHS=TRUE, Viewing Angle=170°, Wavelength=572nm
FB1: library part CMP-0686-00716-3, "FERRITE BEAD 120 OHM 0805 1LN", Case Code (Imperial)=0805, Case Code (Metric)=2012, Current Rating=800mA, DC Current=200mA, DC Resistance (DCR)=100mR, Max Current Rating=1A, Max Operating Temperature=125°C, Min Operating Temperature=-55°C, Package Quantity=1, Resistance=150mR, Tolerance=25%, Case/Package=0805, Core Material=Ferrite, DC Resistance-Max=100mR, Depth=1.25mm, Frequency=100MHz, Height=0.85mm, Impedance=120R, Lead Free="Lead Free", Length=2mm, Material=Steel, Max DC Current=200mA, Military Standard=Not, Number of Circuits=1, Number of Lines=1, Number of Pins=2, Packaging="Tape and Reel", Radiation Hardening=No, REACH SVHC="No SVHC", Series=BLM21A, Shielding=Unshielded, Termination=SMD/SMT, Test Frequency=100MHz, Width=1.25mm
I2C: library part CMP-1502-00601-1, "Male Top Locking Header WR-WTB, THT, Right Angled, pitch 2.54 mm, 1 x 4 position", Contact Resistance=20mOhm, Manufacturer="Wurth Elektronik", Operating Temperature=-40to105degC, Working Voltage=250VAC, Datasheet URL=https://katalog.we-online.de/em/datasheet/6190xx19521.pdf, Gender=Male, Manufacturer URL=http://www.we-online.de, Mounting Technology=THT, Orientation=RightAngled, Package Reference=61900419521, Packaging=Bag, Part Number=61900419521, Pitch=2.54mm, Position=1x4, Publisher=WurthElektronik
MCU: library part CMP-06276-000013-1, "IC MCU 8BIT 32KB FLASH 32TQFP", Frequency=20MHz, Manufacturer=Microchip, Max Supply Voltage=5.5V, Min Supply Voltage=1.8V, Nominal Supply Current=0.04-5.2mA, Package=32A, Temperature="-40°C to +85°C", Temperature Range High=+85°C, Temperature Range Low=-40°C, Automotive=No, Category=IC, ComponentLink2Description=Datasheet, ComponentLink2URL=http://ww1.microchip.com/downloads/en/DeviceDoc/ATmega48A-PA-88A-PA-168A-PA-328-P-DS-DS40002061A.pdf, Core Architecture=AVR, Data Bus Width=8bits, Device Class L1="Integrated Circuits (ICs)", Device Class L2="Embedded Processors and Controllers", Device Class L3=Microcontrollers, Digikey Description="IC MCU 8BIT 32KB FLASH 32TQFP", Footprint Url=http://ww1.microchip.com/downloads/en/appnotes/atmel-8826-seeprom-pcb-mounting-guidelines-surface-mount-packages-applicationnote.pdf, Height=1.2mm, Interface=I2C,SPI,UART,USART,2-Wire, Ipc Land Pattern Name=QFP80P900X900X120-32, Lead Free=Yes, Manufacturer Part Number=ATmega328P-AU, Memory Size=32KBytes, Memory Type=FLASH, Mouser Description="ATmega Series 32 KB Flash 2 KB SRAM 20 MHz 8-Bit Microcontroller - TQFP-32", Number Of A/D Converters=1, Number Of Adc Channels=8, Number Of Cores=1, Number Of I2C Channels=1, Number Of I/Os=23, Number Of Pwm Channels=6, Number Of Spi Channels=1, Number Of Timers/Counters=3, Number Of Uart Channels=1, Octopart=https://octopart.com/atmega328p-au-microchip-77760215, Ram Size=2KBytes, RoHS=TRUE, Standoff Height=0.05mm
P1: library part CMP-1502-01072-1, "THT Vertical Pin Header WR-PHD, Pitch 2.54 mm, Dual Row, 6 pins", Contact Resistance=20mOhm, Manufacturer="Wurth Elektronik", Operating Temperature=-40to105degC, Package Reference=61300621121, Rated Current=3A, Withstanding Voltage=500VAC, Working Voltage=250VAC, Datasheet URL=https://katalog.we-online.de/em/datasheet/6130xx21121.pdf, Gender=Male, Manufacturer URL=http://www.we-online.de, Mounting Technology=THT, Orientation=Vertical, Packaging=Bag, Part Number=61300621121, Pin Number=6, Pitch=2.54mm, Publisher=WurthElektronik, Row Number=Dual
POWER: library part CMP-1684-00017-1, "Female Header, Pitch 5 mm, 1 x 2 Position, Height 10 mm, Tail Length 3.5 mm, Rohs, Bulk", Color=Green, Current=13.5A, Manufacturer="TE Connectivity", Package Description="Female Header, Pitch 5 mm, 1 x 2 Position, Height 10 mm, Tail Length 3.5 mm", Package Reference=THD, Standard Package=300, Voltage=300V, 3D Model=282836-2.pdf, Category=Connectors,Interconnects, Clamp Material - Plating=Brass-NickelPlated, Contact Material - Plating=Brass-TinPlated, Datasheet URL=http://www.te.com.cn/commerce/DocumentDelivery/DDEController?Action=showdoc&DocId=Catalog+Section%7F1308389_EUROSTYLE_TERMINAL_BLOCKS%7F0607%7Fpdf%7FEnglish%7FENG_CS_1308389_EUROSTYLE_TERMINAL_BLOCKS_0607.pdf%7F282836-2, Dynamic Catalog=BuchananSeries, Family=TerminalBlocks-WiretoBoard, Featured Product=EurostyleTerminalBlockConnectors, Features=Interlocking(Side), Housing Material=Polyamide(PA66),Nylon6/6, Manufacturer URL=http://www.te.com, Mating Orientation=HorizontalwithBoard, Mounting Type=ThroughHole, Number of Levels=1, Other Names="5ULV-02B / A98076", Packaging=Bulk, Pitch="0.197\"(5.00mm)", Positions Per Level=2, Product Training Modules=Wire-to-BoardEurostyleTerminalBlocks, RoHS Information=282836-2StatementofCompliance, Screw Material - Plating=Brass-NickelPlated, Screw Thread=M3, Series=Buchanan, Torque - Screw=0.68Nm(6Lb-In), Wire Gauge=16-30AWG, Wire Termination=Screw-RisingCageClamp
R1 R2 R3 R4 R5 R6 R7: library part CMP-1014-00623-2, "Chip Resistor, 10 KOhm, +/- 1%, 0.25 W, -55 to 155 degC, 1206 (3216 Metric), RoHS, Tape and Reel", Case Code (Imperial)=1206, Case Code (Metric)=3216, Manufacturer=Yageo, Max Operating Temperature=155degC, Min Operating Temperature=-55degC, Package Description="2-Pin Surface Mount Device, Body 3.1 x 1.6 mm", Package Quantity=5000, Package Reference=1206.0, Power Rating=250mW, Resistance=10KOhm, Temperature Coefficient=100ppm/degreesC, Tolerance=1%, Voltage Rating=200V, Case/Package=1206, Composition=ThickFilm, Datasheet URL=http://www.yageo.com/NewPortal/yageodocoutput?fileName=/pdf/R-Chip/PYu-RC_Group_51_RoHS_L_5.pdf, Datasheet Version="Rev. 5, 10/2016", Depth=1.6mm, Height=0.55mm, Lead Free=LeadFree, Length=3.1mm, Manufacturer URL=http://www.yageo.com/, Military Standard=Not, Packaging=TapeandReel, REACH SVHC=Unknown, RoHSCompliant=true, Termination=SMD/SMT, Width=1.6mm
RESET: library part CMP-2000-07511-1, "FSMSM Push Button Switch, 50 mA, -35 to 85 degC, 2-Pin SMD, RoHS, Bulk", Case\/Package=SMD/SMT, Contact Current Rating=50mA, Contact Resistance=100mOhm, Manufacturer="TE Connectivity", Max Operating Temperature=85degC, Max Voltage Rating (DC)=12V, Min Operating Temperature=-35degC, Operating Force=180gf, Package Description="2-Pin Surface Mount Device, Body 6 x 3.5 mm, Pitch 9.19 mm", Package Quantity=1000, Voltage Rating (DC)=24V, Actuator Length=1.07mm, Actuator Material=Polyamide, Contact Material=Brass, Contact Plating=Silver, Current Rating=50mA, Datasheet URL=http://www.te.com/commerce/DocumentDelivery/DDEController?Action=showdoc&DocId=Customer+Drawing%7F1437566-3%7FC2%7Fpdf%7FEnglish%7FENG_CD_1437566-3_C2_1437566_3_1_c.dwg.pdf%7F1437566-3, Datasheet Version="Rev. C2, 08/2014", Electrical Life=20000Cycles, ELV=Compliant, Illumination Type=Illuminated, Lead Free=LeadFree, Manufacturer URL=http://www.te.com/, Mechanical Life=20000Cycles, Mount=SurfaceMount, Mounting Technology=SurfaceMount, Orientation=Straight, Package Reference=FSMSM, Packaging=LoosePiece, REACH SVHC=Unknown, RoHSCompliant=true, Switch Travel=0.25mm, Termination=GullWing, Throw Configuration=SPST
U2: library part CMP-1753-00002-2, "3-Axis Gyroscope, Accelerometer and a Digital Motion Processor(TM) (DMP), 2.375 to 3.46 V, -40 to 85 degC, 24-Pin QFN, RoHS, Tape and Reel", Manufacturer=InvenSense, Standard Package=5,000, Category=Sensors,Transducers, Datasheet URL=http://datasheet.octopart.com/MPU-6050-InvenSense-datasheet-14421344.pdf, Datasheet Version="Rev. 3.3, 05/2012", Dynamic Catalog=MPU-6000™Series, Family=Multifunction, Featured Product=MPU-60506-Axis,IntegratedI²CSolution, Manufacturer URL=http://www.invensense.com/, Online Catalog=MPU-6000™Series, Other Names="1428-1007-2 / MPU6050", Output Type=Digital, Sensor Type=MotionTracking, Unit PriceUSD=Digital
U3: library part CMP-0244-00216-1, "Positive Voltage Regulator, 3-Pin DPAK, Tape and Reel", ComponentLink1Description="Manufacturer URL", ComponentLink1URL=http://www.st.com, ComponentLink2Description=Datasheet, ComponentLink2URL=http://www.st.com/internet/com/TECHNICAL_RESOURCES/TECHNICAL_LITERATURE/DATASHEET/CD00000444.pdf, DatasheetVersion=16/11/2011, PackageDescription="3-Pin Transistor Outline Package 2.28 mm Pitch, 9.7 mm Lead Span (DPAK)", PackageReference=TO-252, PackageVersion=2011
U4: library part CMP-209535-000001-1, "LDO Voltage Regulators 1A, 3.3V", Dropout Voltage=1.1V, Manufacturer="Advanced Monolithic Systems", Max Junction Temp=+125°C, Max Power Dissipation=1.2W, Max Supply Voltage=15V, Nominal Supply Current=5mA, Output Current=1A, Output Voltage=3.3V, Package=AMS1117, Temperature="-40°C to +125°C", Temperature Range Low=-40°C, Automotive=No, Category=IC, ComponentLink2Description=Datasheet, ComponentLink2URL=http://www.advanced-monolithic.com/pdf/ds1117.pdf, Device Class L1="Integrated Circuits (ICs)", Device Class L2="Power Management ICs", Device Class L3="Voltage Regulators - Linear", Height=1.8mm, Ipc Land Pattern Name=SOT229P700X180-4, Lead Free=Yes, Manufacturer Part Number=AMS1117-3.3, Number Of Outputs=1, Octopart=https://octopart.com/ams1117-3.3-advanced+monolithic+systems-25899300, Output Type=Fixed, RoHS=TRUE, Standoff Height=0.64mm, Temperature Range High=+125°C
UART: library part CMP-1502-00595-1, "Male Bottom Locking Header WR-WTB, THT, Right Angled, pitch 2.54 mm, 1 x 5 position", Contact Resistance=20mOhm, Manufacturer="Wurth Elektronik", Operating Temperature=-40to105degC, Working Voltage=250VAC, Datasheet URL=https://katalog.we-online.de/em/datasheet/6190xx11021.pdf, Gender=Male, Manufacturer URL=http://www.we-online.de, Mounting Technology=THT, Orientation=RightAngled, Package Reference=61900511021, Packaging=Bag, Part Number=61900511021, Pitch=2.54mm, Position=1x5, Publisher=WurthElektronik
X1: library part CMP-1749-00001-1, "Resistance Weld SMD Crystal, 16 MHz, +/- 30 ppm, 20 pF, -20 to 70 degC, 2-Pin SMD, RoHS, Tape and Reel", Case\Package=SOT-553-6, Max Operating Temperature="150 degC", Max Supply Voltage="3.3 V", Max Supply Voltage (DC)="6 V", Min Operating Temperature="-55 degC", Min Supply Voltage="1.4 V", Min Supply Voltage (DC)="4 V", Output Current="3 mA", Package Quantity=1, ComponentLink1Description="Manufacturer URL", ComponentLink1URL=http://www.foxonline.com/, ComponentLink2Description=Datasheet, ComponentLink2URL=http://foxonline.com/pdfs/hc49sdlf.pdf, DatasheetVersion=Mar-15, Height="0.55 mm", Interface=I2C, Length="1.6 mm", Mount="Surface Mount", PackageDescription="2-Pin Surface Mount Device, Body 5 x 11.7 mm, Height 4.5 mm", PackageReference=FOX-FOXSDLF160-20, Packaging="Cut Tape", Pins=6, Radiation Hardening=No, REACH SVHC="No SVHC", RoHSCompliant=true, Weight="9.9E-05 oz", Width="1.2 mm"

## Free pads (board coordinates)
  round 3.2 hole 3: 1(72.899,52.304) 1(72.899,97.304) 1(122.995,52.304) 1(122.995,97.264)

## Via types
v1: diameter 0.6, hole 0.4, Top Layer to Bottom Layer, 46 vias
v2: diameter 0.5, hole 0.2, Top Layer to Bottom Layer, 4 vias

## Nets (pads, with @x,y where several pads share a name; then routed paths per layer and width w, separated by ;. In a path a pad name is that pad's centre, name@x,y a point inside that pad or via, vN(x,y) a via of type N, cw(c..) or ccw(c..) an arc to the next point about the centre after c; other vN are vias at no path point)
+3.3V: C5.2 C7.1 C18.2 R1.1 R2.1 U2.8 U2.13 U4.2 U4.4 | length 48.4
  Top Layer w0.25: C5.2@79.096,88.748 77.878,88.748 77.673,88.543 77.673,84.48 77.953,84.201 84.176,84.201 84.4,84.425 U2.13 ; C5.2@79.299,88.911 79.561,89.173 C7.1 81.575,89.15 81.9,88.825 U2.8
  Top Layer w0.5: C5.2 79.299,88.836 79.299,88.911 79.299,92.405 79.629,92.735 91.884,92.735 92.177,92.443 92.177,90.805 93.634,89.347 R2.1
  Top Layer w0.85: C18.2 94.209,98.374 94.805,98.97 U4.4
+5V: C9.1 C11.2 C12.1 C13.1 C15.2 C17.2 CH1.2 CH2.2 CH3.2 CH4.2 ESC1.2 ESC2.2 ESC3.2 ESC4.2 FB1.1 I2C.2 MCU.4 MCU.6 P1.5 R3.1 R6.2 U3.3 U4.3 UART.2 | length 19.8
  Top Layer w0.5: C13.1 90.403,75.991 93.057,75.991 MCU.6 ; C12.1 91.107,78 v1(91.491,77.616) MCU.4 ; R3.1 97.301,65.258 97.836,65.258 98.019,65.075 105.689,65.075 106.028,65.414 106.028,66.379 P1.5 ; U4.3 101.734,92.412 104.264,92.412 C17.2 ; C9.1 106.331,78.181 v1(107.036,78.181)
  other v1: 113.96,73.92 114.73,75.46 116.27,75.46 117.81,75.46 91.288,76.022 115.5,77 117.04,77 114.73,78.54 103.145,92.412 102.413,92.431
BAT: C14.2 D1.1 R4.2 U3.1 | length 9.5
  Top Layer w0.5: R4.2 112.785,88.265 113.651,88.265 114.75,87.166 ; U3.1 114.75,87.166 ; D1.1 116.967,88.237 115.821,88.237 114.75,87.166
Battery: D2.2 MCU.24 R4.1 R5.2 | length 16.2
  Top Layer w0.5: MCU.24 101.507,80.041 102.215,80.041 102.235,80.061 102.26,80.061 102.489,80.289 v1(105.766,80.289) ; v1(105.943,84.328) 105.95,84.335 D2.2 105.962,85.687 105.962,88.263 R5.2 R4.1
  Bottom Layer w0.5: v1(105.766,80.289) 105.943,80.467 v1(105.943,84.328)
CH1: CH1.3 MCU.11 | length 16.5
  Top Layer w0.5: v1(95.631,71.069) 96.082,71.52 MCU.11
  Bottom Layer w0.5: v1(95.631,71.069) 95.631,71.042 95.199,70.61 95.199,58.154 95.368,57.985 96.065,57.985 CH1.3
CH2: CH2.3 MCU.12 | length 18.7
  Top Layer w0.5: v1(96.063,70.18) 96.063,70.206 96.882,71.025 MCU.12 ; v1(96.495,61.392) 96.522,61.392 96.979,60.935 99.365,60.935 99.669,60.63 CH2.3 CH2.3@99.568,57.897
  Bottom Layer w0.5: v1(96.063,70.18) 96.063,61.798 96.469,61.392 v1(96.495,61.392) v1@96.52,61.392
CH3: CH3.3 MCU.13 | length 19.8
  Top Layer w0.5: MCU.13 97.682,70.745 v1(97.968,70.46) ; v1(98.273,62.281) 98.273,62.271 98.745,61.798 102.71,61.798 103.073,61.435 103.073,57.772 CH3.3
  Bottom Layer w0.5: v1(97.968,70.46) 97.968,62.586 v1(98.273,62.281)
CH4: CH4.3 MCU.14 | length 22.3
  Top Layer w0.5: MCU.14 98.482,71.266 v1(98.679,71.069) ; v1(99.212,62.941) 99.238,62.941 99.644,62.535 106.018,62.535 106.458,62.095 CH4.3
  Bottom Layer w0.5: v1(98.679,71.069) 98.679,71.042 98.882,70.839 98.882,63.271 v1(99.212,62.941)
ESC1: ESC1.3 MCU.1 | length 37.6
  Top Layer w0.5: v1(78.308,80.239) 78.41,80.34 91.669,80.34 91.968,80.041 93.057,80.041 MCU.1
  Bottom Layer w0.5: ESC1.3@78,57.7 77.978,57.722 77.978,79.881 78.308,80.212 v1(78.308,80.239)
ESC2: ESC2.3 MCU.2 | length 33.2
  Top Layer w0.5: v1(81.712,79.197) 81.991,79.477 91.288,79.477 91.548,79.216 MCU.2
  Bottom Layer w0.5: ESC2.3@81.394,57.762 81.394,78.853 81.712,79.17 v1(81.712,79.197)
ESC3: ESC3.3 MCU.9 | length 23.6
  Top Layer w0.5: ESC3.3@84.789,57.762 84.785,57.765 84.785,60.794 85.078,61.087 92.454,61.087 92.658,61.29 v1(92.685,61.29) ; v1(93.345,71.298) 94.158,72.111 94.183,72.111 94.457,72.384 94.457,72.991 MCU.9
  Bottom Layer w0.5: v1(92.685,61.29) 93.066,61.671 93.066,70.991 93.345,71.271 v1(93.345,71.298)
ESC4: ESC4.3 MCU.10 | length 21.1
  Top Layer w0.5: ESC4.3@88.183,57.762 88.183,59.887 88.519,60.223 93.394,60.223 93.699,60.528 v1(93.726,60.528) ; v1(94.463,71.12) 95.257,71.914 95.257,72.991 MCU.10
  Bottom Layer w0.5: v1(93.726,60.528) 94.107,60.909 94.107,70.737 94.463,71.093 v1(94.463,71.12)
GND: C1.2 C2.1 C3.2 C4.2 C5.1 C6.2 C7.2 C8.2 C9.2 C10.2 C11.1 C12.2 C13.2 C14.1 C15.1 C17.1 C18.1 CH1.1 CH2.1 CH3.1 CH4.1 D2.1 D3.1 D4.1 ESC1.1 ESC2.1 ESC3.1 ESC4.1 I2C.1 MCU.3 MCU.5 MCU.21 P1.1 POWER.1 R5.1 RESET.2 U2.1 U2.9 U2.11 U2.18 U2.25 U3.4 U4.1 UART.1 | length 25.5
  Top Layer w0.25: U2.11 84.9,87.325 v2(85.1,87.525) U2.25 ; U2.9 85.4,88.325 U2.25 ; v2(86.2,87.525) U2.25 ; U2.25@86.825,89.25 v2(86.2,88.625) U2.25 ; U2.1@86.9,90.3 U2.1 cw(c87.82,90.075) 87.169,90.725 87.407,90.963 cw(c87.884,90.486) 87.884,91.161
  Top Layer w0.5: U2.1@87.025,90.075 87.65,90.075 ; MCU.5 96.285,76.816 97.085,77.616 ; MCU.3 96.285,78.416 97.085,77.616 ; C9.2 cw(c104.319,78.293) 104.319,78.202 103.297,78.202 102.711,77.616 MCU.21 97.085,77.616
  other v1: 98.857,77.597 86.36,84.811 78.892,85.242 88.621,90.907
  other v2: 85.1,88.625
"IMU INTERUPT": MCU.32 U2.12 | length 17
  Top Layer w0.25: v1(83.007,85.877) 83.007,86.512 83.312,86.817 83.417,86.817 83.425,86.825 U2.12
  Top Layer w0.35: v1(83.134,82.118) 83.591,81.661 94.382,81.661 94.482,81.561 MCU.32
  Bottom Layer w0.35: v1(83.007,85.877) 83.007,82.245 v1(83.134,82.118)
LED: MCU.23 R7.1 | length 10.6
  Top Layer w0.5: MCU.23 103.31,79.216 103.58,79.485 v1(103.607,79.485) ; v1(103.759,83.058) 108.417,83.058 R7.1
  Bottom Layer w0.5: v1(103.607,79.485) 103.607,82.88 103.708,82.982 103.708,83.007 v1(103.759,83.058)
MISO: MCU.16 P1.6 | length 9.5
  Top Layer w0.5: MCU.16 100.107,72.991 100.107,72.181 100.381,71.907 v1(105.156,71.907)
  Bottom Layer w0.5: v1(105.156,71.907) 105.175,71.888 105.727,71.888 106.121,71.494 P1.6@106.121,69.139
MOSI: MCU.15 P1.3 | length 13.8
  Top Layer w0.5: MCU.15 99.282,71.787 v1(99.517,71.552) v1@99.543,71.552
  Bottom Layer w0.5: v1(99.517,71.552) 99.517,71.525 99.746,71.296 99.746,65.063 100.039,64.77 103.288,64.77 103.581,65.063 P1.3@103.581,66.599
NetC1_1: C1.1 C2.2 FB1.2 MCU.18 | length 16.1
  Top Layer w0.5: MCU.18 103.346,75.216 106.956,71.606 C1.1 C2.2 ; C2.2 112.194,71.578 115.997,71.578 FB1.2@116.025,71.55
NetC3_1: C3.1 MCU.20 | length 3.3
  Top Layer w0.5: MCU.20 104.042,76.816 104.384,76.475 C3.1
NetC4_1: C4.1 U2.10 | length 2.7
  Top Layer w0.25: C4.1 81.65,87.327 81.65,87.7 81.775,87.825 U2.10
NetC6_1: C6.1 U2.20 | length 2.7
  Top Layer w0.25: U2.20 89.492,87.325 89.9,86.917 C6.1@89.9,86.65
NetC16_2: C16.2 UART.5 | length 2.2
  Top Layer w0.5: UART.5 77.208,76.905 C16.2
NetD1_2: D1.2 POWER.2 | length 5.6
  Top Layer w0.5: POWER.2 116.967,97.883 D1.2
NetD3_2: D3.2 R6.1 | length 5.8
  Top Layer w0.5: D3.2 108.026,74.299 108.026,76.632 108.394,77 R6.1
NetD4_2: D4.2 R7.2 | length 3.1
  Top Layer w0.5: R7.2 111.525,80.225 D4.2
OSC1: C8.1 MCU.7 X1.1 | length 15.4
  Top Layer w0.5: C8.1 83.886,73.79 X1.1 83.996,73.9 90.825,73.9 91.35,74.425 91.35,74.923 91.643,75.216 MCU.7
OSC2: C10.1 MCU.8 X1.2 | length 24.1
  Top Layer w0.5: C10.1 83.886,64.386 X1.2 83.972,64.3 v1(91.8,64.3) ; v1(92.075,73.4) 92.075,73.884 92.607,74.416 MCU.8
  Bottom Layer w0.5: v1(91.8,64.3) 92.075,64.575 v1(92.075,73.4)
RESET: C16.1 MCU.29 P1.2 R3.2 RESET.1 | length 60.3
  Top Layer w0.5: C16.1 80.129,77.197 80.554,77.622 83.541,77.622 v1(84.049,78.13) ; v1(96.876,69.698) 96.876,69.671 97.161,69.385 97.161,69.089 101.119,69.089 P1.2 ; v1@96.875,79.85 v1(96.882,79.857) MCU.29 ; R3.2 95.53,68.683 95.238,68.39 95.238,65.16 96.39,64.008 RESET.1@111.432,64.008
  Bottom Layer w0.5: v1(84.049,78.13) 84.049,81.153 84.531,81.636 96.589,81.636 96.882,81.343 v1(96.882,79.857) 96.876,79.851 v1(96.876,69.698)
RXD: MCU.30 UART.3 | length 23.5
  Top Layer w0.5: UART.3 75.194,81.966 77.076,81.966 78.701,83.591 95.707,83.591 96.082,83.217 MCU.30
SCK: MCU.17 P1.4 | length 6.4
  Top Layer w0.5: MCU.17 102.673,74.416 103.53,73.558 v1(103.556,73.558)
  Bottom Layer w0.5: P1.4@103.556,69.606 v1(103.556,73.558)
SCL: I2C.4 MCU.27 R1.2 U2.23 | length 43.9
  Top Layer w0.25: U2.23 89.737,88.825 v1(90.043,88.519)
  Top Layer w0.5: R1.2 97.05,86.252 97.05,85.4 97.35,85.1 97.975,85.1 98.482,84.593 v1(98.482,84.119) MCU.27
  Bottom Layer w0.35: v1(90.043,88.519) 90.043,84.812 90.248,84.607 97.79,84.607 98.231,84.166 98.434,84.166 v1(98.482,84.119)
  Bottom Layer w0.5: I2C.4 87.579,96.849 87.579,93.116 87.96,92.735 97.866,92.735 98.482,92.12 v1(98.482,84.119)
SDA: I2C.3 MCU.28 R2.2 U2.24 | length 32.5
  Top Layer w0.25: U2.24 91.345,89.325 91.846,88.824
  Top Layer w0.35: 91.846,88.824 91.846,86.614 92.151,86.309 93.897,86.309 R2.2
  Top Layer w0.5: R2.2 93.909,84.716 94.325,84.3 97.389,84.3 97.682,84.007 MCU.28
  Bottom Layer w0.5: I2C.3 85.09,92.122 85.383,91.829 91.203,91.829 91.846,91.186 v1(91.846,87.719)
TXD: MCU.31 UART.4 | length 23.5
  Top Layer w0.5: UART.4 75.181,79.451 76.81,79.451 77.165,79.807 77.165,80.797 79.299,82.931 94.964,82.931 95.257,82.638 95.257,81.441 MCU.31
pads on no net: MCU.19 MCU.22 MCU.25 MCU.26 U2.2 U2.3 U2.4 U2.5 U2.6 U2.7 U2.14 U2.15 U2.16 U2.17 U2.19 U2.21 U2.22

## Polygon pours and split planes (outlines as drawn)
GND on Top Layer "GND" (solid, pour order 11): 71.145,100.101 70.536,99.492 70.536,51.638 72.415,49.759 123.596,49.759 125.527,51.689 125.527,99.619 123.723,101.422 72.796,101.422 72.669,101.295
+3.3V on Top Layer "3V3" (solid, pour order 10): 97.79,99.314 ccw(c97.79,99.437) 97.877,99.35 98.044,99.517 cw(c98.105,99.456) 98.105,99.543 100.609,99.543 cw(c100.609,98.991) 101,99.381 101.041,99.339 cw(c100.98,99.278) 101.067,99.278 101.067,98.476 cw(c100.208,98.476) 100.815,97.869 100.279,97.333 ccw(c101.138,96.474) 99.924,96.474 99.924,89.137 cw(c99.23,89.137) 99.72,88.646 cw(c99.659,88.707) 99.659,88.621 93.262,88.621 cw(c93.262,89.401) 92.71,88.849 cw(c92.955,89.094) 92.608,89.094 92.608,89.714 cw(c93.649,89.714) 92.913,90.449 cw(c93.097,90.265) 93.097,90.526 98.248,90.526 ccw(c98.305,91.183) 98.73,90.678 ccw(c98.501,91.014) 98.908,91.014 98.908,95.942 ccw(c96.653,95.942) 98.247,97.536 97.998,97.785 cw(c98.562,98.349) 97.765,98.349 97.765,99.359 cw(c98.025,99.359) 97.841,99.543 98.044,99.543
+5V on Top Layer "5V" (solid, pour order 1): 113.817,80.975 115.858,80.975 cw(c115.858,80.628) 116.103,80.874 cw(c115.858,80.628) 116.205,80.628 116.205,78.845 ccw(c117.072,78.845) 116.459,78.232 ccw(c117.195,78.968) 117.195,77.927 119.596,77.927 cw(c119.596,77.407) 119.964,77.775 cw(c119.719,77.53) 120.066,77.53 120.066,73.538 cw(c118.765,73.538) 119.685,72.619 cw(c119.562,72.741) 119.562,72.568 113.722,72.568 cw(c113.722,72.828) 113.538,72.644 cw(c114.029,73.135) 113.335,73.135 113.335,80.848 cw(c113.817,79.995)
+5V on Layer 2 "5V" (solid, pour order 3): 70.536,99.266 72.641,101.371 123.596,101.371 125.4,99.568 125.4,51.359 123.571,49.53 72.212,49.53 70.409,51.333
GND on Layer 1 "GND" (solid, pour order 5): 70.358,51.816 70.358,99.466 72.39,101.498 123.469,101.498 125.324,99.644 125.324,51.486 123.596,49.759 72.415,49.759
GND on Bottom Layer "GND" (solid, pour order 7): 70.891,99.39 72.923,101.422 123.622,101.422 125.298,99.746 125.298,51.537 123.342,49.581 72.822,49.581 70.739,51.664

## Silkscreen, mask and mechanical layers (free items; w line width, h text height)
Top Overlay:
  drawing of 21 lines, arcs and shapes, not listed
  text "+Y" at 89.049,84.255 h0.52 r270
  text "+Y" at 87.601,83.315 h0.52 r270
  text "+X" at 83.207,83.131 h0.52
  text "+X" at 85.646,81.963 h0.52
Bottom Overlay:
  lines w0.254: 87.648,67.8 89.09,66.358 90.551,67.818 ; 87.673,68.537 89.116,67.094 90.576,68.555 ; 87.673,69.248 89.116,67.805 90.576,69.266
  text "GND" at 80.52,98.042 h0.4
  text "5V" at 82.882,98.042 h0.4
  text "SDA" at 85.574,98.042 h0.4
  text "SCL" at 88.089,98.042 h0.4
  text "BAT+" at 117.426,96.239 h0.4
  text "GND" at 112.346,96.214 h0.4
  text "GND" at 73.458,86.714 h0.4
  text "5V" at 73.458,84.301 h0.4
  text "LAB619 / Engineering & Consulting / Services" at 121.412,82.138 h0.82 r90
  text "RXD" at 73.458,81.837 h0.4
  text "TXD" at 73.458,79.272 h0.4
  text "Proudly Made in Tunisia" at 109.421,78.506 h1.24
  text "DTR" at 73.458,76.732 h0.4
  text "by Jawher MANSOUR" at 108.179,75.748 h1.24
  text "SCK" at 104.269,70.306 h0.4
  text "RST" at 101.652,70.28 h0.4
  text "MISO" at 106.91,70.28 h0.4
  text "July 2022" at 124.004,67.029 h0.52 r90
  text "GND" at 101.5,65.073 h0.4
  text "MOSI" at 104.421,65.073 h0.4
  text "5V" at 106.58,65.073 h0.4
  text "PD4" at 81.84,56.386 h0.4
  text "PD5" at 85.371,56.386 h0.4
  text "PD6" at 88.673,56.386 h0.4
  text "PD7" at 96.801,56.386 h0.4
  text "PD3" at 78.462,56.361 h0.4
  text "PB0" at 100.23,56.336 h0.4
  text "PB1" at 103.532,56.336 h0.4
  text "PB2" at 106.936,56.336 h0.4
  text "5V" at 78.284,53.846 h0.4
  text "5V" at 81.688,53.846 h0.4
  text "5V" at 85.168,53.846 h0.4
  text "5V" at 88.546,53.846 h0.4
  text "5V" at 96.623,53.846 h0.4
  text "5V" at 100.001,53.846 h0.4
  text "5V" at 103.405,53.846 h0.4
  text "5V" at 106.809,53.846 h0.4
  text "GND" at 96.801,51.129 h0.4
  text "GND" at 100.205,51.129 h0.4
  text "GND" at 78.538,51.103 h0.4
  text "GND" at 85.346,51.103 h0.4
  text "GND" at 88.698,51.103 h0.4
  text "GND" at 81.942,51.078 h0.4
  text "GND" at 103.684,51.078 h0.4
  text "GND" at 107.088,51.078 h0.4
Mechanical 1:
  lines w0.254: 70,52.27 ccw(c73.066,52.27) 70.898,50.102 71.102,49.898 ccw(c73.27,52.066) 73.27,49 122.73,49 ccw(c122.73,52.066) 124.898,49.898 125.102,50.102 ccw(c122.934,52.27) 126,52.27 126,97.73 126,98.73 ccw(c122.934,98.73) 125.102,100.898 124.898,101.102 ccw(c122.73,98.934) 122.73,102 73.27,102 ccw(c73.27,98.934) 71.102,101.102 70.898,100.898 ccw(c73.066,98.73) 70,98.73 70,97 70,52.27